# Altium PCB RFID_withESP32_PCB.PcbDoc (part 1 of 2)
Units mm, origin at the board's own origin, x right, y up, seen from the top; angles counter-clockwise.
Board outline 186.82 x 50.8 mm, 2 copper layers (Top Layer, Bottom Layer), stack 0.57 mm thick; 77 components, 38 nets, 231 pads, 164 vias.
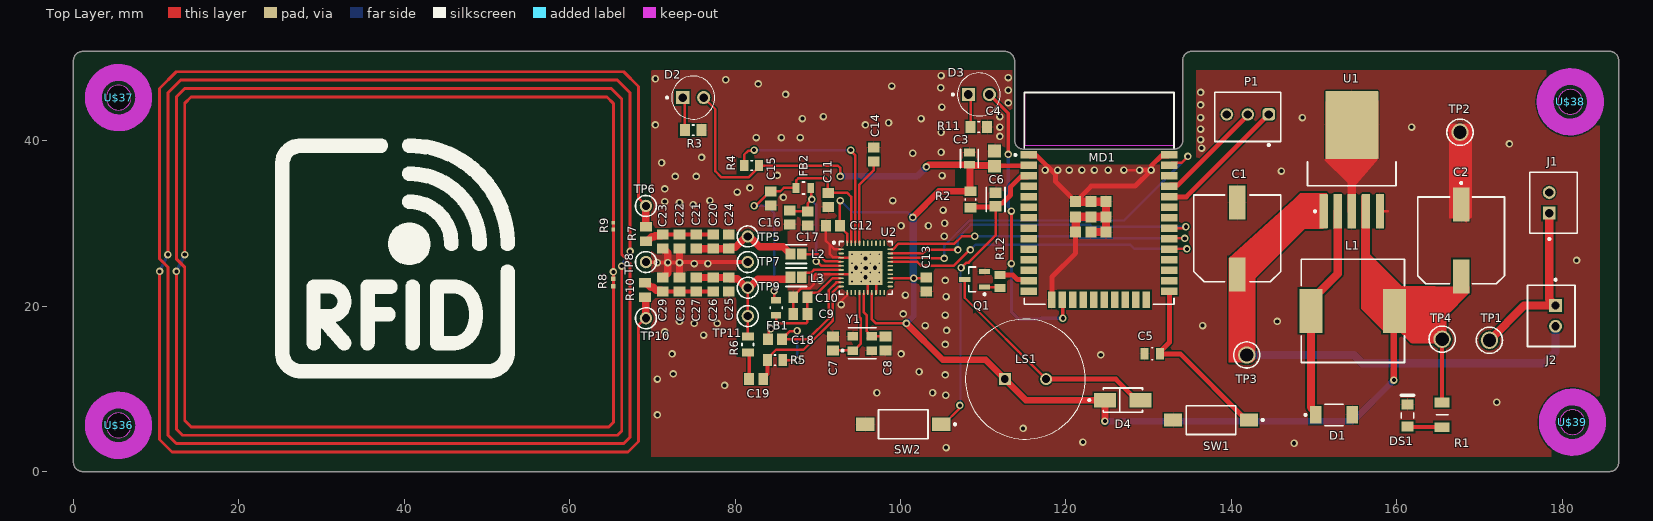
[diagram p0: Top Layer view]
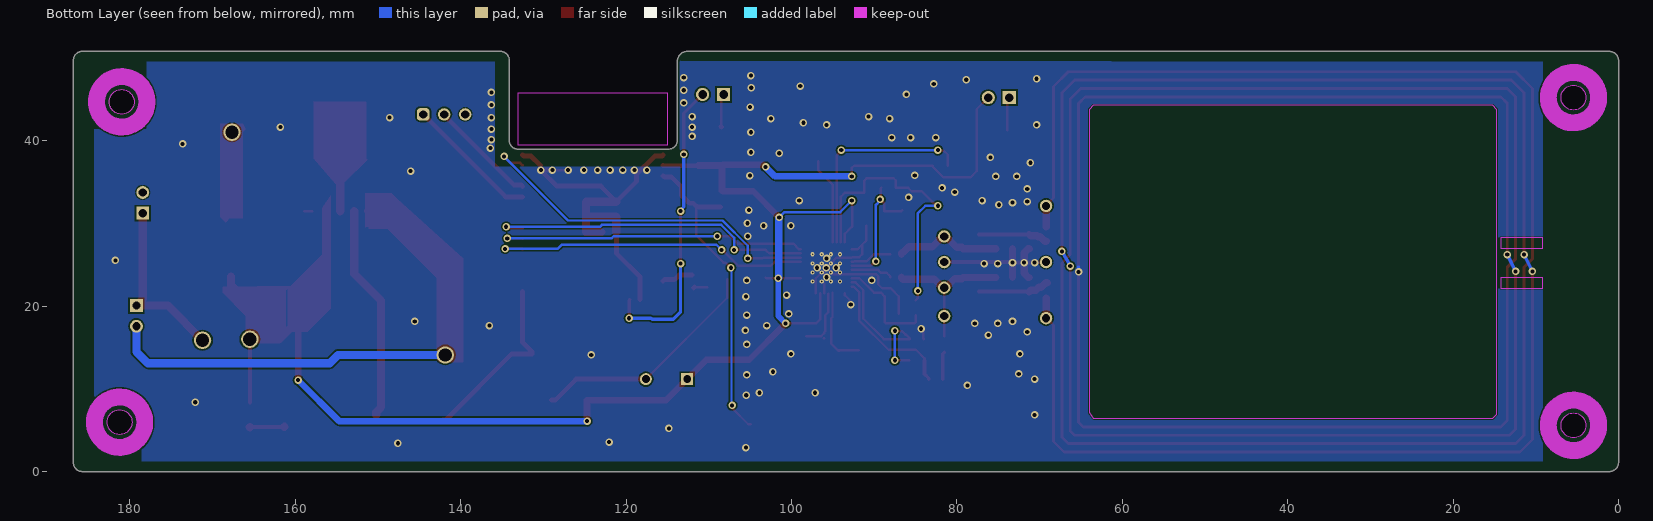
[diagram p1: Bottom Layer view, seen from below]
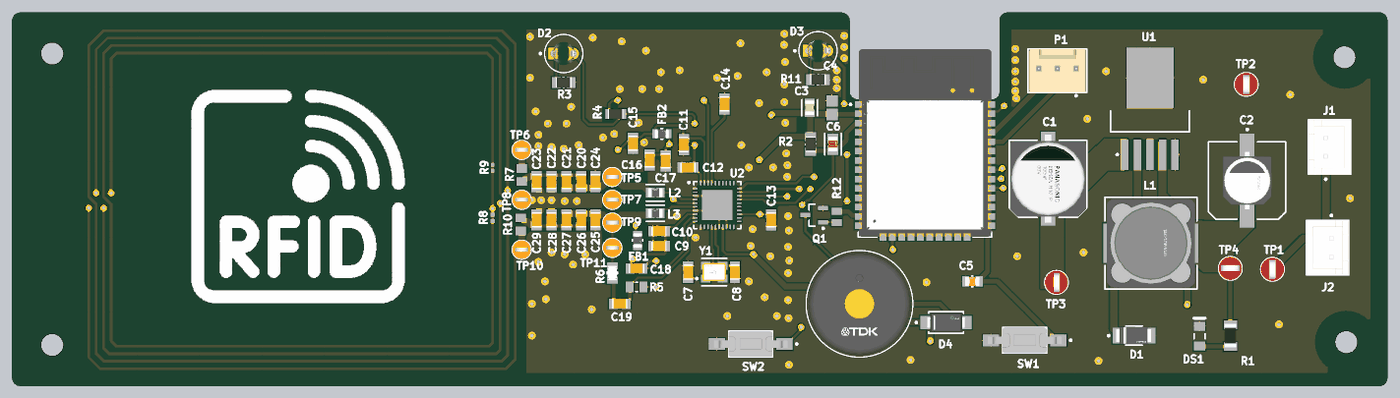
[diagram p2: 3D render of the assembled board from above, using the file's embedded part models]

## Layer stack, top to bottom
Top Solder: solder mask 0.0127, Solder Resist, Dk 3.8
Top Layer: signal copper 0.035
Dielectric: core 0.5, FR-4, Dk 4.5
Bottom Layer: signal copper 0.035
Bottom Solder: solder mask 0.0127, Solder Resist, Dk 3.8

## Board outline
1.143,0 cw(c1.143,1.143) 0,1.143 0,49.657 cw(c1.143,49.657) 1.143,50.8 112.522,50.8 cw(c112.585,49.593) 113.792,49.657 113.792,40.005 ccw(c114.871,40.069) 114.935,38.989 133.096,38.989 ccw(c133.096,40.005) 134.112,40.005 134.112,49.657 cw(c135.191,49.721) 135.128,50.8 185.801,50.8 cw(c185.737,49.721) 186.817,49.657 186.817,1.143 cw(c185.737,1.079) 185.801,0
cut-out: 181.229,4.469 ccw(c181.229,5.969) 182.729,5.969 ccw(c181.229,5.969) 181.229,7.469 ccw(c181.229,5.969) 179.729,5.969 ccw(c181.229,5.969)
cut-out: 180.975,43.204 ccw(c180.975,44.704) 182.475,44.704 ccw(c180.975,44.704) 180.975,46.204 ccw(c180.975,44.704) 179.475,44.704 ccw(c180.975,44.704)
cut-out: 5.461,43.712 ccw(c5.461,45.212) 6.961,45.212 ccw(c5.461,45.212) 5.461,46.712 ccw(c5.461,45.212) 3.961,45.212 ccw(c5.461,45.212)
cut-out: 5.461,4.088 ccw(c5.461,5.588) 6.961,5.588 ccw(c5.461,5.588) 5.461,7.088 ccw(c5.461,5.588) 3.961,5.588 ccw(c5.461,5.588)
cut-out: 180.975,43.204 ccw(c180.975,44.704) 182.475,44.704 ccw(c180.975,44.704) 180.975,46.204 ccw(c180.975,44.704) 179.475,44.704 ccw(c180.975,44.704)
cut-out: 180.975,43.204 ccw(c180.975,44.704) 182.475,44.704 ccw(c180.975,44.704) 180.975,46.204 ccw(c180.975,44.704) 179.475,44.704 ccw(c180.975,44.704)
cut-out: 181.229,4.469 ccw(c181.229,5.969) 182.729,5.969 ccw(c181.229,5.969) 181.229,7.469 ccw(c181.229,5.969) 179.729,5.969 ccw(c181.229,5.969)
cut-out: 5.461,4.088 ccw(c5.461,5.588) 6.961,5.588 ccw(c5.461,5.588) 5.461,7.088 ccw(c5.461,5.588) 3.961,5.588 ccw(c5.461,5.588)
cut-out: 5.461,43.712 ccw(c5.461,45.212) 6.961,45.212 ccw(c5.461,45.212) 5.461,46.712 ccw(c5.461,45.212) 3.961,45.212 ccw(c5.461,45.212)
cut-out: 181.229,4.469 ccw(c181.229,5.969) 182.729,5.969 ccw(c181.229,5.969) 181.229,7.469 ccw(c181.229,5.969) 179.729,5.969 ccw(c181.229,5.969)
cut-out: 5.461,4.088 ccw(c5.461,5.588) 6.961,5.588 ccw(c5.461,5.588) 5.461,7.088 ccw(c5.461,5.588) 3.961,5.588 ccw(c5.461,5.588)
cut-out: 5.461,43.712 ccw(c5.461,45.212) 6.961,45.212 ccw(c5.461,45.212) 5.461,46.712 ccw(c5.461,45.212) 3.961,45.212 ccw(c5.461,45.212)

## Design rules (kind name [scope] priority, off if disabled: settings)
BoardOutlineClearance [All] p1: gap=0.2 ignorepadtopadclearanceinfootprint=FALSE
Clearance Clearance-GND-net [InNetClass('All Nets') vs InNet('GND')] p1: gap=0.19 ignorepadtopadclearanceinfootprint=TRUE
Clearance [All] p2: gap=0.19 ignorepadtopadclearanceinfootprint=TRUE
ComponentClearance [All] p1: gap=0.127 collisioncheckmode=3 verticalgap=0.127 showdistances=TRUE
DiffPairsRouting [All] p1: maxlimit=0.254 minlimit=0.127 mostfreqgap=0.127 toplayer_minwidth=0.127 toplayer_maxwidth=25.4 toplayer_prefwidth=0.127 bottomlayer_minwidth=0.127 bottomlayer_maxwidth=25.4 bottomlayer_prefwidth=0.127 maxuncoupledlength=12.7
Height [All] p1: minheight=0 maxheight=1816.048 prefheight=12.7
HoleSize [All] p1: absolutevalues=TRUE maxlimit=6.3 minlimit=0.3 maxpercent=80.000 minpercent=20.000
HoleToHoleClearance [All] p1: gap=0.25 allowstackedmicrovias=FALSE
MinimumAnnularRing [All] p1: minimumring=0.076
MinimumSolderMaskSliver [All] p1: minsoldermaskwidth=0
PlaneClearance [All] p1: clearance=0.127
PlaneConnect PlaneConnectPowerPads [InPadClass('PowerPads')] p1: planeconnectstyle=Direct reliefexpansion=0.508 reliefentries=4 reliefconductorwidth=0.254 reliefairgap=0.254
PlaneConnect [All] p2: pad.planeconnectstyle=Relief pad.reliefexpansion=0.3 pad.reliefentries=4 pad.reliefconductorwidth=0.127 pad.reliefairgap=0.127 via.planeconnectstyle=Direct via.reliefexpansion=0.3 via.reliefentries=4 via.reliefconductorwidth=0.127 via.reliefairgap=0.127
PolygonConnect PolygonConnectPowerPads [All vs (InPadClass('PowerPads'))] p1: connectstyle=Direct reliefconductorwidth=0.254 reliefentries=4 polygonreliefangle="90 Angle" airgapwidth=0.254
PolygonConnect [All] p2: thpad.connectstyle=Relief thpad.reliefconductorwidth=0.127 thpad.reliefentries=4 thpad.polygonreliefangle="90 Angle" thpad.airgapwidth=0.127 smdpad.connectstyle=Relief smdpad.reliefconductorwidth=0.127 smdpad.reliefentries=4 smdpad.polygonreliefangle="90 Angle" smdpad.airgapwidth=0.127 via.connectstyle=Direct via.reliefconductorwidth=0.127 via.reliefentries=4 via.polygonreliefangle="90 Angle" via.airgapwidth=0.127
RoutingVias [All] p1: holewidth=0.394 width=0.8 viastyle="Through Hole" minholewidth=0.3 minwidth=0.6 maxholewidth=0.6 maxwidth=6.6
SilkToSilkClearance [All] p1: silktosilkclearance=0
SilkToSolderMaskClearance [IsPad] p1: minsilkscreentomaskgap=0.127 clearancetoexposedcopper=TRUE
SolderMaskExpansion [All] p1: expansion=0.075 istentingtop=FALSE
Width [All] p1: maxlimit=25.4 minlimit=0.127 preferedwidth=0.3 minimp=50.000000 maximp=50.000000 favimp=50.000000
20 further rules are at their usual default settings.

## Classes and differential pairs
component class U_RFID_Reader: C7 C8 C9 C10 C11 C12 C13 C14 C15 C16 C17 C18 C19 D2 FB1 FB2 L2 L3 R3 R4 R5 R6 TP11 U2 Y1
component class U_Power_Circuit: C1 C2 D1 DS1 J1 J2 L1 R1 TP1 TP2 TP3 TP4 U1
component class U_Outputs: D3 D4 LS1 Q1 R11 R12
component class U_ESP32-WROOM-32: C3 C4 C5 C6 MD1 P1 R2 SW1 SW2
component class U_Antenna_Matching_Circuit: C20 C21 C22 C23 C24 C25 C26 C27 C28 C29 R7 R8 R9 R10 TP5 TP6 TP7 TP8 TP9 TP10

## Components (designator, comment, footprint, x,y, rotation, side; value= is the part's Value field where it differs from the comment)
C1 "470uF" FP-ZAG-MFG 140.716,28.194 r270 top value=100uF
C2 "330uF" FP-FKG-MFG 167.767,27.94 r270 top
C3 "10uF" FP-C0805C-DG-MFG 108.331,37.846 r270 top
C4 "0.1uF" CAPC2013X94X50ML20T25 111.379,37.846 r270 top
C5 "100nF" FP-CC0805-0_85-MFG 130.429,14.224 r180 top value="100 nF"
C6 "100nF" FP-0805-L_2_01_0_2-W_1_25-IPC_B 111.506,32.893 r90 top
C7 "33pF" CAPC2013X135X45NL10T25 91.837,15.49 r270 top
C8 "33pF" CAPC2013X135X45NL10T25 98.187,15.49 r90 top
C9 "0.1uF" CAPC2013X135X45NL10T25 87.884,19.05 r0 top
C10 "10uF" CAPC2013X135X45NL10T25 87.884,21.082 r0 top
C11 "0.1uF" CAPC2013X135X45NL10T25 91.242,32.837 r270 top
C12 "0.1uF" CAPC2013X135X45NL10T25 91.821,29.718 r180 top
C13 "0.1uF" CAPC2013X135X45NL10T25 103.124,22.606 r90 top
C14 "10uF" CAPC2013X135X45NL10T25 96.774,38.354 r270 top
C15 "0.1uF" CAPC2013X135X45NL10T25 84.332,33.02 r90 top
C16 "10uF" CAPC2013X135X45NL10T25 86.618,30.734 r90 top
C17 "0.1uF" CAPC2013X135X45NL10T25 88.777,30.607 r90 top
C18 "0.1uF" CAPC2013X135X45NL10T25 84.832,16.006 r0 top
C19 "1000pF" CAPC2013X135X45NL10T25 82.55,11.192 r180 top
C20 "NC" CAPC2013X135X45NL10T25 77.335,27.809 r90 top
C21 "22pF" CAPC2013X135X45NL10T25 75.307,27.809 r90 top
C22 "100pF" CAPC2013X135X45NL10T25 73.279,27.809 r90 top
C23 "NC" CAPC2013X135X45NL10T25 71.251,27.809 r90 top
C24 "220pF" CAPC2013X135X45NL10T25 79.24,27.809 r270 top
C25 "220pF" CAPC2013X135X45NL10T25 79.24,22.61 r270 top
C26 "NC" CAPC2013X135X45NL10T25 77.335,22.61 r90 top
C27 "22pF" CAPC2013X135X45NL10T25 75.307,22.61 r90 top
C28 "100pF" CAPC2013X135X45NL10T25 73.279,22.61 r90 top
C29 "NC" CAPC2013X135X45NL10T25 71.251,22.61 r90 top
D1 "CMS06(TE12L,Q,M)" FP-M-FLAT-MFG 152.4,6.858 r180 top
D2 "POWER-LED" FP-6_544-5255_01-4-MFG 74.93,45.212 r0 top
D3 "Detect-LED" FP-6_544-5255_01-4-MFG 109.474,45.593 r0 top
D4 "RS1M" FP-403AE-MFG 126.873,8.636 r0 top value=10pF
DS1 "SML-LX1206IC-TR" LUMX-SML-LX1206IC_V 161.29,6.778 r90 top
FB1 "HZ0805B272R-10" FP-MPZ2012-MFG 84.963,19.812 r270 top
FB2 "HZ0805B272R-10" FP-MPZ2012-MFG 88.265,34.29 r0 top
J1 "B2B-XH-A(LF)(SN)" FP-B2B-XH-A_LF_SN-MFG 178.96,32.492 r90 top
J2 "Switch" FP-B2B-XH-A_LF_SN-MFG 178.672,18.816 r270 top
L1 "SRR1210-101M" FP-SRR1210-MFG 154.686,19.431 r0 top
L2 "560nH" FP-LQM21DN_00-IPC_C 87.376,26.289 r180 top
L3 "560nH" FP-LQM21DN_00-IPC_C 87.376,23.495 r180 top
LS1 "BUZZER" FP-PS1440P02BT-MFG 115.102,11.176 r0 top
MD1 "ESP32-WROOM-32" FP-ESP32-WROOM-32-MFG 124.006,33.031 r0 top
P1 "61900311121" 61900311121 141.986,42.88 r0 top
Q1 "BC847C" INF-SOT23_M 108.966,23.241 r180 top
R1 "2K" RESC3216X75N 165.481,6.858 r90 top
R2 "1K" RESC2013X60X35ML10T20 108.458,32.893 r270 top
R3 "10R" RESC2013X60X35ML10T20 74.93,41.275 r0 top
R4 "10K" RESC2013X60X35NL10T20 82,37 r0 top
R5 "1.0K" RESC2013X50X30NL20T20 84.832,13.474 r0 top
R6 "1.7K" FP-CRCW0805-e3-MFG 81.534,15.371 r270 top
R7 "1.5" RESC2013X70X40NL20T20 69.219,28.706 r90 top
R8 "NC" RESC1005X40X25NL05T05 65.278,22.855 r90 top
R9 "NC" RESC1005X40X25LL05T05 65.278,29.674 r90 top
R10 "1.5" RESC2013X70X40NL20T20 69.096,21.967 r90 top
R11 "10R" RESC2013X60X35ML10T20 109.474,41.656 r0 top
R12 "220R" RESC2013X70X40LL20T20 112.014,22.987 r270 top
SW1 "Boot Button" TECO-FSMSM-2_V 137.541,6.223 r180 top
SW2 "RESET Button" TECO-FSMSM-2_V 100.33,5.715 r180 top
TP1 "12V_IN" KSTN-5010_V 171.196,15.875 r90 top
TP2 "GND" KSTN-5010_V 167.64,41.021 r90 top
TP3 "12V" KSTN-5010_V 141.859,14.097 r90 top
TP4 "3.3V" KSTN-5010_V 165.481,16.002 r0 top
TP5 "TX1_POST" KSTN-5003 81.534,28.43 r0 top
TP6 "TX1_PRE" KSTN-5003 69.223,32.113 r0 top
TP7 "TGND" KSTN-5003 81.534,25.327 r0 top
TP8 "TGND" KSTN-5003 69.227,25.327 r0 top
TP9 "TX2_POST" KSTN-5003 81.534,22.224 r0 top
TP10 "TX2_PRE" KSTN-5003 69.223,18.541 r0 top
TP11 "RX" KSTN-5003 81.534,18.796 r0 top
U1 "LM2596S-3.3" KTT0005B_N 154.559,37.719 r90 top
U2 "PN5321A3HN/C106;55" NXP-HVQFN-40_L 95.79,24.62 r0 top
U$36 "" MOUNTINGHOLE_3.0 5.461,5.588 r0 top
U$37 "" MOUNTINGHOLE_3.0 5.461,45.212 r0 top (schematic designator U$36)
U$38 "" MOUNTINGHOLE_3.0 180.975,44.704 r0 top (schematic designator U$36)
U$39 "" MOUNTINGHOLE_3.0 181.229,5.969 r0 top (schematic designator U$36)
Y1 "ABM8-27.120MHZ-B4-T" FP-ABM8-MFG 95.377,15.494 r0 top

## Footprints (in the part's own frame and the unit in brackets; to place one, negate y for a bottom-side part, rotate by r counter-clockwise, add the part's x,y. Pads: shape width x height; smd on the part's side, far side on the other; paste and mask are expansions set on the pad)
61900311121 [mm] "2.54mm Male Locking Header, 3p"
  rrect50% 1.5x1.5 hole 1: 1(2.54,0.3)
  round 1.5 hole 1: 2(0,0.3) 3(-2.54,0.3)
  silkscreen extent -3.98,-3.52 3.98,2.98, body extent -3.81,-2.9 3.81,2.9, height 11.53
CAPC2013X94X50ML20T25 [mm] "Chip Capacitor, 2-Leads, Body 2.01x1.25mm, IPC Low Density"
  rect 1.55x1.55 smd: 1(-0.925,0) 2(0.925,0)
  body extent -1.1,-0.72 1.11,0.72, height 0.94
CAPC2013X135X45NL10T25 [mm] "Chip Capacitor, 2-Leads, Body 2.10x1.35mm, IPC Medium Density"
  rect 1.2x1.4 smd: 1(-0.85,0) 2(0.85,0)
  body extent -1.05,-0.67 1.05,0.67, height 1.35
FP-6_544-5255_01-4-MFG [mm]
  rect 1.6x1.6 hole 1.05 paste-1000 mask+0: 1(-1.27,0)
  round 1.6 hole 1.05 paste-1000 mask+0: 2(1.27,0)
  silkscreen extent -3.27,-2.6 2.6,2.6, body extent -2.32,-2.32 2.32,2.32, height 0.25
FP-403AE-MFG [mm]
  rect 2.65x1.75 smd paste+0 mask+0: 1(-2.15,0) 2(2.15,0)
  silkscreen extent -4.17,-1.48 2.37,1.48, body extent -3.57,-1.58 3.57,1.58, height 0.25
FP-0805-L_2_01_0_2-W_1_25-IPC_B [mm]
  rect 1.305x1.456 smd paste+0 mask+0: 1(-0.806,0) 2(0.806,0)
  silkscreen extent -1.46,-1.13 1.46,1.13, body extent -1.71,-0.98 1.71,0.98, height 0.25
FP-ABM8-MFG [mm]
  rect 1.3x1.05 smd paste+0 mask+0: 1(-1.15,-0.875) 2(1.15,-0.875) 3(1.15,0.875) 4(-1.15,0.875)
  silkscreen extent -2.5,-1.88 1.7,1.88, body extent -1.9,-1.5 1.9,1.5, height 0.25
FP-B2B-XH-A_LF_SN-MFG [mm]
  rect 1.55x1.55 hole 1 paste-1000 mask+0: 1(-1.25,0.525)
  round 1.55 hole 1 paste-1000 mask+0: 2(1.25,0.525)
  silkscreen extent -4.5,-2.88 3.7,2.88, body extent -3.8,-2.98 3.8,2.98, height 0.25
FP-C0805C-DG-MFG [mm]
  rect 0.95x1.35 smd paste+0 mask+0: 1(-0.75,0) 2(0.75,0)
  silkscreen extent -1.11,-1.08 1.1,1.07, body extent -1.4,-0.85 1.4,0.85, height 0.25
FP-CC0805-0_85-MFG [mm]
  rect 0.95x1.4 smd paste+0 mask+0: 1(-0.925,0) 2(0.925,0)
  silkscreen extent -0.08,-0.72 0.08,0.72, body extent -1.6,-1.05 1.6,1.05, height 0.25
FP-CRCW0805-e3-MFG [mm]
  rect 0.95x1.45 smd paste+0 mask+0: 1(-0.975,0) 2(0.975,0)
  silkscreen extent -0.13,-0.7 0.13,0.7, body extent -1.55,-0.82 1.55,0.82, height 0.25
FP-ESP32-WROOM-32-MFG [mm]
  rect 2x0.9 smd paste+0 mask+0: 1(-8.5,5.26) 2(-8.5,3.99) 3(-8.5,2.72) 4(-8.5,1.45) 5(-8.5,0.18) 6(-8.5,-1.09) 7(-8.5,-2.36) 8(-8.5,-3.63) 9(-8.5,-4.9) 10(-8.5,-6.17) 11(-8.5,-7.44) 12(-8.5,-8.71) 13(-8.5,-9.98) 14(-8.5,-11.25) 25(8.5,-11.25) 26(8.5,-9.98) 27(8.5,-8.71) 28(8.5,-7.44) 29(8.5,-6.17) 30(8.5,-4.9) 31(8.5,-3.63) 32(8.5,-2.36) 33(8.5,-1.09) 34(8.5,0.18) 35(8.5,1.45) 36(8.5,2.72) 37(8.5,3.99) 38(8.5,5.26)
  rect 0.9x2 smd paste+0 mask+0: 15(-5.715,-12.25) 16(-4.445,-12.25) 17(-3.175,-12.25) 18(-1.905,-12.25) 19(-0.635,-12.25) 20(0.635,-12.25) 21(1.905,-12.25) 22(3.175,-12.25) 23(4.445,-12.25) 24(5.715,-12.25)
  rect 1.33x1.33 smd paste+0 mask+0: 39(-2.835,-4.075) 39(-2.835,-2.24) 39(-2.835,-0.405) 39(-1,-4.075) 39(-1,-2.24) 39(-1,-0.405) 39(0.835,-4.075) 39(0.835,-2.24) 39(0.835,-0.405)
  Keep-Out Layer region: -9,6.45 9,6.45 9,12.75 -9,12.75
  Keep-Out Layer region: -9,6.45 9,6.45 9,12.75 -9,12.75
  silkscreen extent -10.25,-12.8 9.05,12.8, body extent -9.6,-13.35 9.6,12.9, height 0.25
FP-FKG-MFG [mm]
  rect 4.1x2 smd paste+0 mask+0: 1(-4.35,0) 2(4.35,0)
  silkscreen extent -7.07,-5.25 5.25,5.25, body extent -6.65,-5.5 6.65,5.5, height 0.25
FP-LQM21DN_00-IPC_C [mm]
  rect 1.154x1.356 smd paste+0 mask+0: 1(-0.676,0) 2(0.676,0)
  silkscreen extent -1.25,-1.12 1.25,1.12, body extent -1.35,-0.82 1.35,0.82, height 0.25
FP-M-FLAT-MFG [mm]
  rect 1.4x2.1 smd paste+0 mask+0: 1(-2.2,0) 2(2.2,0)
  silkscreen extent -1.12,-1.3 3.57,1.3, body extent -3,-1.4 3,1.4, height 0.25
FP-MPZ2012-MFG [mm]
  rect 0.8x1.2 smd paste+0 mask+0: 1(-0.9,0) 2(0.9,0)
  silkscreen extent -0.13,-0.72 0.13,0.72, body extent -1.4,-0.82 1.4,0.82, height 0.25
FP-PS1440P02BT-MFG [mm]
  rect 1.45x1.45 hole 0.95 paste-1000 mask+0: 1(-2.5,0)
  round 1.45 hole 0.95 paste-1000 mask+0: 2(2.5,0)
  silkscreen extent -7.25,-7.25 7.25,7.25, body extent -7.35,-7.35 7.35,7.35, height 0.25
FP-SRR1210-MFG [mm]
  rect 2.8x5.3 smd paste+0 mask+0: 1(-5.05,0) 2(5.05,0)
  silkscreen extent -6.25,-6.25 6.25,6.25, body extent -6.55,-6.35 6.55,6.35, height 0.25
FP-ZAG-MFG [mm]
  rect 4.1x2 smd paste+0 mask+0: 1(-4.35,0) 2(4.35,0)
  silkscreen extent -5.25,-5.25 5.25,5.25, body extent -6.65,-5.5 6.65,5.5, height 0.25
INF-SOT23_M [mm] "SOT23, 3-Leads, Body 2.9x1.3 mm, Pitch 0.95 mm, IPC Low Density"
  rect 1.35x0.6 smd: 1(-1.2,0.95) 2(-1.2,-0.95) 3(1.2,0)
  silkscreen extent -1.33,-1.5 0.7,1.92, body extent -0.7,-1.5 0.7,1.5, height 1.1
KSTN-5003 [mm] "Test Point, Through Hole, Dia 2.54mm"
  round 1.5 hole 1: 1(0,0)
  silkscreen extent -1.27,-1.27 1.27,1.27, body extent -1.27,-1.27 1.27,1.27, height 4.57
KSTN-5010_V [mm] "Test Point, Dia 3.17mm"
  round 2.1 hole 1.6: 1(0,0)
  silkscreen extent -1.58,-1.59 1.58,1.59, body extent -1.59,-1.59 1.59,1.59, height 8.13
KTT0005B_N [mm] "DPAK, 5-Leads, Body 10.65x9.65mm, Pitch 1.7mm, IPC Medium Density"
  rrect10% 4.15x1 smd: 1(-6.25,3.4) 2(-6.25,1.7) 3(-6.25,0) 4(-6.25,-1.7) 5(-6.25,-3.4)
  rrect2% 8.2x6.4 smd: 6(4.2,0)
  silkscreen extent -6.37,-5.35 -0.3,5.35, body extent -3.15,-5.32 6.5,5.33, height 4.83
LUMX-SML-LX1206IC_V [mm] "SMD, 2-Leads, Body 3.2x1.5mm"
  rect 1.2x1.5 smd: 1(-1.35,0) 2(1.35,0)
  silkscreen extent -0.35,-0.75 2.45,0.75, body extent -1.6,-0.8 1.6,0.8, height 1.1
MOUNTINGHOLE_3.0 [mm] "MOUNTINGHOLE_3.0"
  Top Layer keep-out circle w2.032: c0,0 r3.048
  Top Layer keep-out circle w2.032: c0,0 r3.048
  Top Layer keep-out circle w2.032: c0,0 r3.048
  Bottom Layer keep-out circle w2.032: c0,0 r3.048
  Bottom Layer keep-out circle w2.032: c0,0 r3.048
NXP-HVQFN-40_L [mm] "QFN, 40-Leads, Body 6.1x6.1mm, Pitch 0.5mm, Thermal Pad 4.1x4.1mm, IPC High Density"
  oval 0.65x0.2 smd: 1(-2.975,2.25) 2(-2.975,1.75) 3(-2.975,1.25) 4(-2.975,0.75) 5(-2.975,0.25) 6(-2.975,-0.25) 7(-2.975,-0.75) 8(-2.975,-1.25) 9(-2.975,-1.75) 10(-2.975,-2.25) 21(2.975,-2.25) 22(2.975,-1.75) 23(2.975,-1.25) 24(2.975,-0.75) 25(2.975,-0.25) 26(2.975,0.25) 27(2.975,0.75) 28(2.975,1.25) 29(2.975,1.75) 30(2.975,2.25)
  oval 0.2x0.65 smd: 11(-2.25,-2.975) 12(-1.75,-2.975) 13(-1.25,-2.975) 14(-0.75,-2.975) 15(-0.25,-2.975) 16(0.25,-2.975) 17(0.75,-2.975) 18(1.25,-2.975) 19(1.75,-2.975) 20(2.25,-2.975) 31(2.25,2.975) 32(1.75,2.975) 33(1.25,2.975) 34(0.75,2.975) 35(0.25,2.975) 36(-0.25,2.975) 37(-0.75,2.975) 38(-1.25,2.975) 39(-1.75,2.975) 40(-2.25,2.975)
  rect 4.1x4.1 smd: 41(0,0)
  silkscreen extent -3.97,-3.2 3.2,3.2, body extent -3.05,-3.05 3.05,3.05, height 1
RESC1005X40X25LL05T05 [mm] "Chip Resistor, 2-Leads, Body 1.00x0.50mm, IPC High Density"
  rect 0.45x0.45 smd: 1(-0.4,0) 2(0.4,0)
  body extent -0.53,-0.27 0.53,0.28, height 0.4
RESC1005X40X25NL05T05 [mm] "Chip Resistor, 2-Leads, Body 1.00x0.50mm, IPC Medium Density"
  rect 0.55x0.55 smd: 1(-0.45,0) 2(0.45,0)
  body extent -0.53,-0.27 0.53,0.28, height 0.4
RESC2013X50X30NL20T20 [mm] "Chip Resistor, 2-Leads, Body 2.00x1.25mm, IPC Medium Density"
  rect 1.05x1.45 smd: 1(-0.925,0) 2(0.925,0)
  silkscreen extent -0.1,-0.63 0.1,0.63, body extent -1.1,-0.72 1.1,0.72, height 0.5
RESC2013X60X35ML10T20 [mm] "Chip Resistor, 2-Leads, Body 2.1x1.35mm, IPC Low Density"
  rect 1.2x1.45 smd: 1(-1,0) 2(1,0)
  silkscreen extent -0.1,-0.63 0.1,0.63, body extent -1.05,-0.68 1.05,0.67, height 0.6
RESC2013X60X35NL10T20 [mm] "Chip Resistor, 2-Leads, Body 2.1x1.35mm, IPC Medium Density"
  rect 1x1.35 smd: 1(-0.9,0) 2(0.9,0)
  silkscreen extent -0.1,-0.58 0.1,0.58, body extent -1.05,-0.68 1.05,0.67, height 0.6
RESC2013X70X40LL20T20 [mm] "Chip Resistor, 2-Leads, Body 2.00x1.25mm, IPC High Density"
  rect 0.95x1.35 smd: 1(-0.775,0) 2(0.775,0)
  body extent -1.1,-0.72 1.1,0.72, height 0.7
RESC2013X70X40NL20T20 [mm] "Chip Resistor, 2-Leads, Body 2.00x1.25mm, IPC Medium Density"
  rect 1.15x1.45 smd: 1(-0.875,0) 2(0.875,0)
  body extent -1.1,-0.72 1.1,0.72, height 0.7
RESC3216X75N [mm]
  rect 1.2x1.8 smd: 1(-1.5,0) 2(1.5,0)
  silkscreen extent 0,-0.7 0,0.7, body extent -1.6,-0.8 1.6,0.8, height 0.75
TECO-FSMSM-2_V [mm] "SMD, 2-Leads, Body 6x3.5mm, Pitch 9.19mm"
  rect 2.2x1.6 smd: 1(-4.595,0)
  rect 2.18x1.6 smd: 2(4.595,0)
  silkscreen extent -6.37,-1.75 3,1.75, body extent -4.98,-1.75 4.98,1.75, height 4.4

## Part data
C1: library part CMP-2000-06221-2, "CAP ALUM POLY HYB 100UF 50V SMD", Capacitance=100uF, Leakage Current=50uA, Manufacturer=Panasonic, Manufacturer Part Number=EEHZA1H101P, Package=ZAG, Ripple Current=2000mA, Temperature="-55°C to +105°C", Temperature Range High=+105°C, Temperature Range Low=-55°C, Tolerance=20%, Voltage=50V, Automotive=Yes, Automotive Grade="Grade 2", Category=Cap, ComponentLink2Description=Datasheet, ComponentLink2URL=https://industrial.panasonic.com/cdbs/www-data/pdf/RDD0000/ABA0000C1221.pdf, Device Class L1="Passive Components", Device Class L2=Capacitors, Device Class L3="Polymer Capacitors", Digikey Description="CAP ALUM POLY HYB 100UF 50V SMD", Dissipation Factor=10%, Esr=28mΩ, Footprint Url=https://industrial.panasonic.com/cdbs/www-data/pdf/RDD0000/DMD0000COL4.pdf, Height=10.5mm, Lead Free=Yes, Life=10000Hours, Material="Conductive Polymer", Mounting Type="Surface Mount", Mouser Description="Cap Aluminum Polymer Hybrid 100uF 50VDC 20% (10 X 10.2mm) SMD 0.028 Ohm 2000mA 10000h 105C Embossed T/R", Octopart=https://octopart.com/eeh-za1h101p-panasonic-22287466, RoHS=TRUE, Voltage Rating=50V
C2: library part CMP-05427-002115-1, "CAP ALUM 330UF 20% 35V SMD", Case/Package=Radial, Dielectric Material=Aluminium, ESR (Equivalent Series Resistance)=80mR, Leakage Current=115.5uA, Max Operating Temperature=105°C, Min Operating Temperature=-55°C, Package Quantity=500, Ratings=AEC-Q200, Ripple Current=850mA, Tolerance=20%, Voltage=35V, Capacitance=330uF, Construction=Cylindrical, Contact Plating=Tin, Diameter=10mm, Height=10.2mm, Height - Seated (Max)=0.402inch, Impedance=80mR, Lead Free="Lead Free", Lead Length=3.5mm, Lead Pitch=4.6mm, Length=10.2mm, Life (Hours)=2000Hour, Mount="Surface Mount", Number of Pins=2, Packaging="Tape and Reel", Radiation Hardening=No, Reach SVHC Compliant=Yes, Ripple Current (AC)=850mA, RoHS Compliant=Yes, Series=FK, Termination=SMD/SMT, Voltage Rating=35V, Voltage Rating (DC)=35V, Width=10.3mm
C3: library part CMP-2007-03243-2, "CAP CER 10UF 10V X5R 0805", 3DS Part Number=220-00001, Manufacturer=Kemet, Manufacturer Part Number=C0805C106K8PACTU, Package=C0805C-DG, Temperature="-55°C to +85°C", Temperature Characteristic=X5R, Temperature Coefficient=15%, Temperature Range High=+85°C, Temperature Range Low=-55°C, Tolerance=10%, Voltage=10V, Automotive=No, Capacitance=10uF, Category=Cap, ComponentLink2Description=Datasheet, ComponentLink2URL=https://content.kemet.com/datasheets/KEM_C1006_X5R_SMD.pdf, Device Class L1="Passive Components", Device Class L2=Capacitors, Device Class L3="Ceramic Capacitors", Digikey Description="CAP CER 10UF 10V X5R 0805", Height=1.4mm, Ipc Land Pattern Name=CAPC200125X125, Lead Free=Yes, Material=Ceramic, Mouser Description="CAP CER 10UF 10V X5R 0805", Octopart=https://octopart.com/c0805c106k8pactu-kemet-98697, RoHS=TRUE, Voltage Rating=10V
C4: library part CMP-1036-04427-2, Manufacturer="AVX Interconnect / Elco", Part Number=08051C104JAT2A
C5: library part CMP-2100-03606-3, "CAP CER 0.1UF 50V X7R 0805", Capacitance="100 nF", Manufacturer=Yageo, Manufacturer Part Number=CC0805KRX7R9BB104, Package=CC0805-0.85, Temperature="-30°C to +85°C", Temperature Characteristic=X7R, Temperature Range High=+85°C, Temperature Range Low=-30°C, Tolerance=0.1, Voltage Rating="50 V", Automotive=No, Category=Cap, ComponentLink2Description=Datasheet, ComponentLink2URL=http://www.yageo.com/documents/recent/UPY-GPHC_Y5V_6.3V-to-50V_8.pdf, Device Class L1="Passive Components", Device Class L2=Capacitors, Device Class L3="Ceramic Capacitors", Digikey Description="CAP CER 0.1UF 50V X7R 0805", Footprint Url=http://www.yageo.com/exep/pages/download/literatures/UPY-C_GEN_24.pdf, Height=0.95mm, Ipc Land Pattern Name=CAPC200125X85, Lead Free=Yes, Material=Ceramic, Mouser Description="Multilayer Ceramic Capacitors MLCC - SMD/SMT 100nF 50V X7R 10%", Octopart=https://octopart.com/cc0805krx7r9bb104-yageo-192993, RoHS=TRUE
C6: library part CMP-2007-04174-2, "General Purpose Ceramic Capacitor, 0805, 100nF, 10%, X7R, 15%, 100V", Case Code (Imperial)=0805, Case Code (Metric)=2012, Dielectric=X7R, Dielectric Material=Ceramic, Max Operating Temperature=125°C, Min Operating Temperature=-55°C, Package Quantity=2000, Tolerance=10%, Voltage=100V, Capacitance=100nF, Case/Package=0805, Construction=Flat, Contact Plating=Tin, Depth=1.25mm, Height=1.4mm, Lead Free="Lead Free", Length=2.01mm, Mount="Surface Mount", Number of Pins=2, Packaging="Tape and Reel", Radiation Hardening=No, REACH SVHC="No SVHC", RoHS Compliant=Yes, Series=-, Termination=SMD/SMT, Thickness=0.055inch, Voltage Rating=100V, Voltage Rating (DC)=100V, Width=0.049inch
C7 C8 C9 C10 C11 C12 C13 C14 C15 C16 C17 C18 C19 C20 C21 C22 C23 C24 C25 C26 C27 C28 C29: library part CMP-2100-03644-1, "Chip Capacitor, 0.1 uF, +/- 10%, 50 V, -55 to 125 degC, 0805 (2012 Metric), RoHS, Tape and Reel", Capacitance=100nF, Case Code (Imperial)=0805, Case Code (Metric)=2012, Dielectric=X7R, Dielectric Material=Ceramic, Insulation Resistance=10GR, Manufacturer=Murata, Max Operating Temperature=125degC, Min Operating Temperature=-55degC, Package Description="2-Pin Surface Mount Device, Body 2 x 1.25 mm", Package Quantity=1, Tolerance=10%, Voltage=50V, Case/Package=0805, Datasheet URL=http://psearch.en.murata.com/capacitor/product/GRM21BR71H104KA01%23.pdf, Datasheet Version=42675.0, Depth=1.25mm, Height=1.25mm, Lead Free=LeadFree, Length=2mm, Manufacturer URL=http://www.murata.com/, Material=Ceramic, Mount=SurfaceMount, Number of Pins=2, Package Reference=0805, Packaging=TapeandReel, Radiation Hardening=No, REACH SVHC=Unknown, RoHSCompliant=true, Termination=SMD/SMT, Thickness=0.053inch, Voltage Rating=50V, Voltage Rating (DC)=50V, Width=0.049inch
D1: library part CMP-2000-06115-2, "DIODE SCHOTTKY 30V 2A MFLAT", Average Rectified Current=2A, Forward Voltage=370mV, Max Operating Temperature=125°C, Max Repetitive Reverse Voltage (Vrrm)=30V, Max Reverse Leakage Current=3mA, Max Surge Current=40A, Min Operating Temperature=-40°C, Package Quantity=1, Contact Plating=Tin, Element Configuration=Single, Forward Current=2A, Max Reverse Voltage (DC)=30V, Mount="Surface Mount", Number of Pins=2, Packaging="Tape and Reel", Peak Non-Repetitive Surge Current=40A, Peak Reverse Current=3mA, Radiation Hardening=No
D2 D3: library part CMP-00030-55433990-1, "TLLG4400 Led, Pcb, Green, 0.63MCD, 3MM, T-1, 7MA, 1.9V, 565NM, 25DEG, 20V, 20MW, -40", Case/Package=T, Color=Green, Forward Current=2mA, Forward Voltage=1.9V, Max Operating Temperature=100°C, Max Power Dissipation=20mW, Min Operating Temperature=-40°C, Reverse Voltage=20V, Voltage Rating (DC)=2.4V, Depth=3.2mm, Dominant Wavelength=575nm, Height=4.5mm, Illumination Color=Green, Length=3.2mm, Lens Color=Green, Lens Size=3mm, Lens Style="Circular, Colored, Diffused, Dome, Round", Lens Transparency=Diffused, Luminous Intensity=1.2mcd, Mount="Through Hole", NexarPartId=55433990, Number of Elements=1, Number of LEDs=1, Number of Pins=2, Power Dissipation=20mW, Radiation Hardening=No, REACH SVHC=Unknown, RoHS=Compliant, Schedule B="8541402000, 8541402000", Test Current=2mA, Viewing Angle=50°, Wavelength=575nm
D4: library part CMP-07163-000022-1, "DIODE GEN PURP 1KV 1A SMA", Capacitance=10pF, Forward Current=1A, Manufacturer="ON Semiconductor", Max Junction Temp=+150°C, Max Repetitive Reverse Voltage=1000V, Max Surge Forward Current=30A, Package=403AE, Peak Reverse Current=5uA, Temperature="-55°C to +150°C", Temperature Range Low=-55°C, Automotive=No, Category=Diode, ComponentLink2Description=Datasheet, ComponentLink2URL=https://www.onsemi.com/pub/Collateral/RS1M-D.PDF, Device Class L1="Discrete Semiconductors", Device Class L2=Diodes, Device Class L3="Rectifier Diodes", Digikey Description="DIODE GEN PURP 1KV 1A SMA", Footprint Url=https://www.onsemi.com/pub/Collateral/403AE.PDF, Height=2.5mm, Lead Free=Yes, Manufacturer Part Number=RS1M, Mouser Description="On a Reel of 7500, ON Semi 1000V 1A, Diode, 2-Pin DO-214AC RS1M", Octopart=https://octopart.com/rs1m-on+semiconductor-84331238, RoHS=TRUE, Standoff Height=0.05mm, Temperature Range High=+150°C
DS1: library part CMP-2000-07123-1, "LED Red, 65 mW, -40 to 85 degC, 2-Pin SMD, RoHS, Tape and Reel", Color=Red, Manufacturer=Lumex, Operating Temperature=-25to85C, Package Description="2-Pin Surface Mount Device, Body 3.2 x 1.5 mm", Package Reference=SML-LX1206IC, Reverse Voltage=5(Min)V, Supplier_Package=SMD, Datasheet URL=http://www.lumex.com/content/files/ProductAttachment/SML-LX1206IC-TR.pdf, Datasheet Version="Rev. J, 08/2012", Dimension=3.2x1.6x1.1mm, Dominant Wavelength=N/A, ECCN=EAR99, Family=SML-LX1206IC, HTS=8541402000, Intensity=6mcd, LED Material=GaAsP, Lens Appearance=ColorlessNonDiffused, Lens Dimensions=2x1.6x0.5mm, Manufacturer URL=http://www.lumexinstruments.com/, Mounting=SurfaceMount, Mounting Technology=SurfaceMount, Number of LEDs=1, Packaging=TapeandReel, Part No=SML-LX1206IC-TR, Peak Wavelength=635nm, Pin_Count=2, RoHS=Unknown, Supplier=Lumex, Supplier Standard Pack=3,000, Type=Uni-Color, Viewing Angle=160
FB1 FB2: library part CMP-08257-000007-1, "FERRITE BEAD 100 OHM 0805 1LN", Case Code (Imperial)=0805, Case Code (Metric)=2012, DC Resistance (DCR)=20mR, Max Current Rating=4A, Max Operating Temperature=125°C, Min Operating Temperature=-55°C, Package Quantity=4000, Ratings=AEC-Q200, Test Frequency=100MHz, Tolerance=25%, Case/Package=0805, Core Material=Ferrite, Depth=1.25mm, Height=0.85mm, Impedance=100R, Lead Free="Lead Free", Length=0.079inch, Max DC Current=4A, Mount="Surface Mount", Number of Lines=1, Packaging="Tape and Reel", Termination=SMD/SMT, Weight=0.000194oz, Width=1.25mm
J1: library part CMP-2000-05888-3, "CONN HEADER VERT 2POS 2.5MM", Color=Natural, Contact Resistance=20mR, Current Rating=3A, Housing Color=White, Insulation Resistance=1GR, Max Operating Temperature=85°C, Max Voltage Rating (AC)=250V, Min Operating Temperature=-25°C, Connector Type="Male Pin", Contact Material=Brass, Contact Plating=Tin, Contact Type="Male Pin", Depth=5.75mm, Fastening Type=Detent, Housing Material=Polyamide, Lead Free="Lead Free", Lead Pitch=2.5mm, Length=7.4mm, Max Current Rating=3A, Max Voltage Rating (DC)=250V, Mount="Through Hole", Number of Contacts=2, Number of Positions=2, Number of Rows=1, Orientation=Straight, Packaging=Bulk, Pitch=2.5mm, REACH SVHC="No SVHC", Series=XH, Termination=Solder, Voltage Rating=250V, Voltage Rating (AC)=250V, Wire/Cable Gauge=22AWG
J2: library part CMP-2000-05888-3, "To power Switch", Color=Natural, Contact Resistance=20mR, Current Rating=3A, Housing Color=White, Insulation Resistance=1GR, Max Operating Temperature=85°C, Max Voltage Rating (AC)=250V, Min Operating Temperature=-25°C, Connector Type="Male Pin", Contact Material=Brass, Contact Plating=Tin, Contact Type="Male Pin", Depth=5.75mm, Fastening Type=Detent, Housing Material=Polyamide, Lead Free="Lead Free", Lead Pitch=2.5mm, Length=7.4mm, Max Current Rating=3A, Max Voltage Rating (DC)=250V, Mount="Through Hole", Number of Contacts=2, Number of Positions=2, Number of Rows=1, Orientation=Straight, Packaging=Bulk, Pitch=2.5mm, REACH SVHC="No SVHC", Series=XH, Termination=Solder, Voltage Rating=250V, Voltage Rating (AC)=250V, Wire/Cable Gauge=22AWG
L1: library part CMP-07248-000065-1, "FIXED IND 100UH 2.5A 135MOHM SMD", Case/Package=1210, Current Rating=2.5A, DC Resistance (DCR)=135mR, Inductance=100uH, Inductance Tolerance=20%, Max Operating Temperature=125°C, Min Operating Temperature=-40°C, Package Quantity=1, Resistor Type=Wirewound, Saturation Current=2.2A, Self Resonant Frequency=3MHz, Test Frequency=100kHz, Core Material=Ferrite, DC Current=2.5A, Depth=12.5mm, Height=10mm, Height - Seated (Max)=0.394inch, Length=12mm, Max DC Current=2.5A, Military Standard=Not, Mount="Surface Mount", Packaging="Tape and Reel", Q Factor=16, REACH SVHC="No SVHC", RMS Current (Irms)=2.5A, RoHS Compliant=Yes, Series=SRR1210, Shielding=Shielded, Termination=SMD/SMT, Tolerance=20%, Width=0.472inch
L2 L3: library part CMP-06042-016670-1, "Multilayer Type Inductor for General Circuits, 0805 (2012), 0.56μH, 10%, 0.63Ω, 150mA", Case Code (Imperial)=0805, Case Code (Metric)=2012, Current Rating=150mA, DC Resistance (DCR)=630mR, Max Operating Temperature=85°C, Min Operating Temperature=-40°C, Package Quantity=4000, Self Resonant Frequency=140MHz, Test Frequency=25MHz, Tolerance=10%, Case/Package=0805, Core Material=Ferrite, DC Current=150mA, Depth=1.45mm, Height=0.85mm, Height - Seated (Max)=0.041inch, Inductance=560nH, Lead Free="Lead Free", Length=2mm, Max DC Current=150mA, Military Standard=Not, Mount="Surface Mount", Packaging="Tape and Reel", Q Factor=25, Radiation Hardening=No, RoHS Compliant=Yes, Series=LQM21N, Shielding=Shielded, Termination=SMD/SMT, Width=1.25mm
LS1: library part CMP-08413-000003-1, "AUDIO PIEZO TRANSDUCER 30V TH", Frequency=4kHz, Max Operating Temperature=70°C, Min Operating Temperature=-10°C, Operating Supply Voltage=3V, Package Quantity=350, Diameter=14mm, Height=8mm, Lead Free="Lead Free", Mount="Through Hole", Number of Terminals/Pins=2, Packaging="Tape and Reel", RoHS Compliant=Yes, Self Resonant Frequency=4kHz, Termination="PC Pins", Voltage Rating (DC)=3V, Washable=No
MD1: library part CMP-194065-000008-1, "RX TXRX MOD WIFI SURFACE MOUNT", Case/Package=SMD/SMT, Frequency=2.5GHz, Max Operating Temperature=85°C, Min Operating Temperature=-40°C, Operating Supply Voltage=3.6V, Package Quantity=550, Data Rate=150Mbps, Mount="Surface Mount", Packaging="Cut Tape", Sensitivity=-98dBm, Weight=0.088185oz
P1: library part CMP-1502-00585-2, Color=Beige, Contact Resistance=20mΩ, Current Rating=3A, Flammability Rating="UL94 V-0", Insulation Resistance=1GΩ, Max Operating Temperature=105°C, Min Operating Temperature=-40°C, Operating Supply Voltage=250V, Connector Type="Male Pin", Contact Gender=Male, Contact Material=Copper, Contact Mating Length=7.493mm, Contact Plating=Tin, Fastening Type=Friction, Gender=Male, Height=12.5mm, Housing Material=Nylon, Lead Pitch=2.54mm, Length=7.62mm, Mount="Through Hole", NexarPartId=18818222, Number of Contacts=3, Number of Pins=3, Number of Positions=3, Number of Rows=1, Orientation=Vertical, Packaging=Bulk, Pitch=2.54mm, REACH SVHC=Unknown, RoHS=Compliant, Termination="Through Hole", Voltage Rating=250V, Width=7.66mm
Q1: library part CMP-1177-00042-1, "NPN Silicon AF Transistor, 45 V VCEO, 100 mA IC, SOT23, Reel, Green", Manufacturer=Infineon, PartNumber=BC847B, ComponentLink1Description="Manufacturer URL", ComponentLink1URL=http://www.infineon.com/, ComponentLink2Description=Datasheet, ComponentLink2URL=http://www.infineon.com/dgdl/bc847series_bc848series_bc849series_bc850series.pdf?folderId=db3a304314dca389011541d30fa21656&fileId=db3a304314dca389011541d4630a1657, ComponentLink3Description="Package Specification", ComponentLink3URL=http://www.infineon.com/dgdl/SOT23-Package_Overview.pdf?folderId=db3a30431936bc4b0119532290053c66&fileId=db3a30431936bc4b0119533468123c85, fT (typ)="250Â MHz", Green=TRUE, IBM (max)="200Â mA", IC (max)="100Â mA", ICBO (max)="15Â nA", ICM (max)="200Â mA", Mounting Technology="Surface Mount", PackageDescription="3-Pin Small Outline Transistor Package, 1.3 x 2.9 mm Body, 0.95 mm Pitch", PackageReference=SOT23, PackageVersion=Apr-08, Packing=Reel, Polarity=NPN, Ptot (max)="330Â mW", VCBO (max)="50Â V", VCEO (max)="45Â V", VEBO (max)="6Â V"
R1: library part CR1206-FX-1022ELF, "Resistor", Manufacturer_Name=Bourns, Mouser Part Number=652-CR1206FX-1022ELF, Arrow Part Number=CR1206-FX-1022ELF, Arrow Price/Stock=https://www.arrow.com/en/products/cr1206-fx-1022elf/bourns, Datasheet Link=http://componentsearchengine.com/Datasheets/1/CR1206-FX-1022ELF.pdf, Height=0.75mm, Manufacturer_Part_Number=CR1206-FX-1022ELF, Mouser Price/Stock=https://www.mouser.co.uk/ProductDetail/Bourns/CR1206-FX-1022ELF?qs=3wWX5hyYeeRJQVfgTvfo2Q%3D%3D
R2: library part CMP-2100-03671-1, "Chip Resistor, 1 KOhm, +/- 1%, 125 mW, -55 to 155 degC, 0805 (2012 Metric), RoHS, Tape and Reel", Case Code (Imperial)=0805, Case Code (Metric)=2012, Manufacturer=Yageo, Max Operating Temperature=155degC, Max Power Dissipation=125mW, Min Operating Temperature=-55degC, Package Description="2-Pin Surface Mounted Device, Body 2 x 1.25 mm", Package Quantity=1, Resistance=1KOhm, Temperature Coefficient=100ppm/degreesC, Tolerance=1%, Voltage Rating=150V, Case/Package=0805, Composition=ThickFilm, Datasheet URL=http://www.yageo.com/NewPortal/yageodocoutput?fileName=/pdf/R-Chip/PYu-RC_Group_51_RoHS_L_5.pdf, Datasheet Version="Rev. 5, 10/2016", Depth=1.25mm, Height=0.024inch, Lead Free=LeadFree, Length=0.079inch, Manufacturer URL=http://www.yageo.com/, Military Standard=Not, Number of Pins=2, Number of Terminations=2, Package Reference=0805, Packaging=TapeandReel, Power Rating=125mW, REACH SVHC=Unknown, RoHSCompliant=true, Termination=SMD/SMT, Voltage Rating (DC)=150V, Width=0.049inch
R3 R11: library part CMP-2100-03670-1, "Chip Resistor, 10 Ohm, +/- 1%, 0.125 W, -55 to 155 degC, 0805 (2012 Metric), RoHS, Tape and Reel", Case Code (Imperial)=0805, Case Code (Metric)=2012, Manufacturer=Yageo, Max Operating Temperature=155degC, Max Power Dissipation=125mW, Min Operating Temperature=-55degC, Package Description="2-Pin Surface Mounted Device, Body 2 x 1.25 mm", Package Quantity=1, Resistance=10Ohm, Temperature Coefficient=200ppm/degreesC, Tolerance=1%, Voltage Rating=150V, Case/Package=0805, Composition=ThickFilm, Datasheet URL=http://www.yageo.com/NewPortal/yageodocoutput?fileName=/pdf/R-Chip/PYu-RC_Group_51_RoHS_L_5.pdf, Datasheet Version="Rev. 5, 10/2016", Depth=1.25mm, Height=0.5mm, Lead Free=LeadFree, Length=2mm, Manufacturer URL=http://www.yageo.com/, Number of Pins=2, Number of Terminations=2, Package Reference=0805, Packaging=TapeandReel, Power Rating=125mW, REACH SVHC=NoSVHC, RoHSCompliant=true, Termination=SMD/SMT, Voltage Rating (DC)=150V, Width=1.25mm
R4: library part CMP-1659-00013-4, "Chip Resistor, 10 KOhm, +/- 1%, 0.125 W, -55 to 155 degC, 0805 (2012 Metric), RoHS, Tape and Reel", Manufacturer=Yageo, Max Operating Temperature="155 degC", Min Operating Temperature="-55 degC", Package Quantity=5000, Voltage Rating="150 V", ComponentLink1Description="Manufacturer URL", ComponentLink1URL=http://www.yageo.com/, ComponentLink2Description=Datasheet, ComponentLink2URL=http://www.yageo.com/documents/recent/PYu-RC_Group_51_RoHS_L_04.pdf, DatasheetVersion="Rev. 4, 02/2016", Height="0.5 mm", Length="2 mm", Mount="Surface Mount", Mounting Technology="Surface Mount", PackageDescription="2-Pin Surface Mounted Device, Body 2 x 1.25 mm", PackageReference=0805, Packaging="Tape and Reel", Pins=2, REACH SVHC="No SVHC", RoHSCompliant=true
R5: library part CMP-1013-00510-2, Manufacturer="Vishay Dale", Part Number=CRCW08051K00FKEA
R6: library part CMP-2001-03615-2, "RES Thick Film, 1.5kΩ, 1%, 0.125W, 100ppm/°C, 0805", Case Code (Imperial)=0805, Case Code (Metric)=2012, Max Operating Temperature=155°C, Max Power Dissipation=125mW, Min Operating Temperature=-55°C, Package Quantity=10, Resistance=1.5kR, Temperature Coefficient=100ppm/°C, Tolerance=1%, Voltage Rating=150V, Case/Package=0805, Composition="Thick Film", Contact Plating=Tin, Depth=1.25mm, Features="Automotive AEC-Q200", Height=0.45mm, Lead Free="Lead Free", Length=2mm, Military Standard=Not, Number of Terminations=2, Packaging="Tape and Reel", Power Rating=125mW, Radiation Hardening=No, Termination=SMD/SMT, Voltage Rating (DC)=150V, Weight=0.000194oz, Width=0.049inch
R7 R10: library part CMP-2001-00490-1, Manufacturer=Panasonic, Part Number=ERJ6BQF1R5V
R8 R9: library part CMP-2002-08382-1, Manufacturer="Vishay Dale", Part Number=CRCW040222R0FKED
R12: library part CMP-2001-00044-1, Manufacturer=Panasonic, Part Number=ERJ6ENF2200V
SW1 SW2: library part CMP-2000-07511-1, "FSMSM Push Button Switch, 50 mA, -35 to 85 degC, 2-Pin SMD, RoHS, Bulk", Case\/Package=SMD/SMT, Contact Current Rating=50mA, Contact Resistance=100mOhm, Manufacturer="TE Connectivity", Max Operating Temperature=85degC, Max Voltage Rating (DC)=12V, Min Operating Temperature=-35degC, Operating Force=180gf, Package Description="2-Pin Surface Mount Device, Body 6 x 3.5 mm, Pitch 9.19 mm", Package Quantity=1000, Package Reference=FSMSM, Voltage Rating (DC)=24V, Actuator Length=1.07mm, Actuator Material=Polyamide, Contact Material=Brass, Contact Plating=Silver, Current Rating=50mA, Datasheet URL=http://www.te.com/commerce/DocumentDelivery/DDEController?Action=showdoc&DocId=Customer+Drawing%7F1437566-3%7FC2%7Fpdf%7FEnglish%7FENG_CD_1437566-3_C2_1437566_3_1_c.dwg.pdf%7F1437566-3, Datasheet Version="Rev. C2, 08/2014", Electrical Life=20000Cycles, ELV=Compliant, Illumination Type=Illuminated, Lead Free=LeadFree, Manufacturer URL=http://www.te.com/, Mechanical Life=20000Cycles, Mount=SurfaceMount, Mounting Technology=SurfaceMount, Orientation=Straight, Packaging=LoosePiece, REACH SVHC=Unknown, RoHSCompliant=true, Switch Travel=0.25mm, Termination=GullWing, Throw Configuration=SPST
TP1 TP2 TP3 TP4: library part CMP-1672-00002-4, "Test Point, Red, Through Hole, RoHS, Bulk", Colour=Red, Manufacturer=Keystone, Package Quantity=100, ComponentLink1Description="Manufacturer URL", ComponentLink1URL=http://www.keyelco.com/, ComponentLink2Description=Datasheet, ComponentLink2URL=http://www.keyelco.com/product-pdf.cfm?p=1319, Contact Material=Bronze, Contact Plating=Silver, DatasheetVersion="Rev. F, 12/2013", Height="8.12 mm", Mount="Through Hole", Mounting Technology="Through Hole", PackageDescription="1-Pin Through Hole Device, Dia 3.17 mm", PackageReference=5010, Packaging=Bulk, Pins=1, REACH SVHC="No SVHC", RoHSCompliant=true
TP5 TP6 TP7 TP8 TP9 TP10 TP11: library part CMP-1672-00009-1, "Test Point, Orange, 1-Pin THD, RoHS", Forward Current="3 A", Forward Voltage="1.08 V", Max Operating Temperature="150 degC", Max Surge Current="80 A", Min Operating Temperature="-65 degC", Package Quantity=500, Peak Reverse Current="600 uA", ComponentLink1Description="Manufacturer URL", ComponentLink1URL=http://www.keyelco.com/, ComponentLink2Description=Datasheet, ComponentLink2URL=http://keyelco.com/userAssets/file/M65p56.pdf, DatasheetVersion=Jun-15, Diameter="5.3 mm", Height="0.25 inch", Length="9.5 mm", Mount="Through Hole", PackageDescription="1-Pin Through Hole Device, Dia 2.54 mm", PackageReference=5003, Packaging=Bulk, Pins=2, Radiation Hardening=No, REACH SVHC="No SVHC", RoHSCompliant=true, Weight="0.01 lb", Width="0.25 inch"
U1: library part CMP-0069-00276-3, "SIMPLE SWITCHER® Power Converter 150 KHz 3A Step-Down Voltage Regulator, 5-pin TO-263", Manufacturer="Texas Instruments", PackageTopMarking="NSUZXYTTE#*LM2596S*-3.3 P+", PowerWise=N, Code_JEDEC=MO-169-AB, ComponentLink1Description="Datasheet URL", ComponentLink1URL=http://www.ti.com/general/docs/lit/getliterature.tsp?genericPartNumber=LM2596&fileType=pdf, CompType=Switcher, PackageDescription="TO-263, Molded, .400 x .390 x .180in, 5 Lead, .067in Pitch, Surface Mount", PackageReference=KTT0005B, PinCount=5, RoHS=N
U2: library part CMP-2000-05282-1, "NFC Controller, 13.56 MHz, -30 to 85 degC, 40-Pin HVQFN (SOT618-1), RoHS, Tray", Manufacturer="NXP Semiconductors", Maximum Operating Temperature=+85C, Minimum Operating Temperature=-25C, Operating Frequency=13.56MHz, Package / Case=QFN-40, Supply Current=12uA, Supply Voltage - Max=5.5V, Supply Voltage - Min=2.7V, Brand=NXPSemiconductors, Datasheet URL=https://datasheet.ciiva.com/1172/1391932-1172875.pdf, Datasheet Version="Rev. 1.2, 03/2011", Factory Pack Quantity=490, Manufacturer URL=http://www.nxp.com/, Mounting Style=SMD/SMT, Packaging=Tray, Product Category=RFWirelessMisc, RoHS=Details, Type=NearFieldTransmissionModule,Read/Write
U$36 U$37 U$38 U$39: library part MOUNTINGHOLE_3.0, PackageName=MOUNTINGHOLE_3.0
Y1: library part CMP-27762-000994-1, "Crystal 27.12MHz ±30ppm 18pF SMD-4 3.2mm x 2.5mm", Capacitance=1.8E-11F, Case/Package=SMD/SMT, ESR (Equivalent Series Resistance)=50R, Frequency=27.12MHz, Frequency Stability=50ppm, Frequency Tolerance=30ppm, Load Capacitance=18pF, Max Operating Temperature=70°C, Min Operating Temperature=-20°C, Height=0.031inch, Lead Free="Lead Free", Length=0.126inch, Mount="Surface Mount", Packaging="Tape and Reel", RoHS Compliant=Yes, Width=0.098inch

## Free pads (board coordinates)
  round 3 hole 3 unplated: MH1(5.461,5.588) MH1(5.461,45.212) MH1(180.975,44.704) MH1(181.229,5.969)

## Via types
v1: diameter 0.907/0.907 (per signal layer), hole 0.5, Top Layer to Bottom Layer, 148 vias
v2: diameter 0.5, hole 0.2, Top Layer to Bottom Layer, 16 vias

## Nets (pads, with @x,y where several pads share a name; then routed paths per layer and width w, separated by ;. In a path a pad name is that pad's centre, name@x,y a point inside that pad or via, vN(x,y) a via of type N, cw(c..) or ccw(c..) an arc to the next point about the centre after c; other vN are vias at no path point)
AVDD: C9.2 C10.2 FB1.2 U2.8 | length 12.7
  Top Layer w0.3: FB1.2 84.963,18.083 85.139,17.907 88.558,17.907 88.734,18.083 C9.2 C10.2 88.734,21.182 89.184,21.632 90.041,21.632 91.785,23.376 92.709,23.376 U2.8@92.715,23.37
EN: C6.1 MD1.3 R2.2 SW2.1 | length 38.5
  Top Layer w0.3: SW2.1 105.225,5.715 107.092,7.582 107.092,7.905 v1(107.188,8.001) ; v1(107.315,24.638) 107.322,24.638 107.957,25.273 108.235,25.273 111.506,28.544 C6.1
  Top Layer w0.6: R2.2@108.555,31.99 111.409,31.99 C6.1 111.858,32.44 112.32,32.44 113.312,33.431 113.312,34.43 114.483,35.601 115.356,35.601 MD1.3
  Bottom Layer w0.3: v1(107.188,8.001) 107.251,8.064 107.251,24.575 v1(107.315,24.638)
FB3: C2.2 C3.2 C4.2 C12.1 C13.2 D2.2 D4.1 L1.2 LS1.1 MD1.2 R1.2 R2.1 R4.2 TP4.1 U1.4 U2.17 U2.23 U2.40 | length 215.2
  Top Layer w0.3: D2.2 77.597,43.815 77.597,36.322 78.359,35.56 81.635,35.56 82.9,36.825 R4.2 92.413,37 92.71,36.703 v1(92.71,35.687) ; v1(92.71,32.766) 92.671,32.727 C12.1 92.671,29.618 93.54,28.749 U2.40@93.54,27.695 ; U2.17@96.54,21.545 96.54,18.395 97.028,17.907 v1(100.711,17.907) ; U2.23@98.865,23.37 98.866,23.369 v1(101.6,23.368) v1(101.6,23.368) 103.036,23.368 C13.2
  Top Layer w0.5: R1.2 TP4.1
  Top Layer w0.6: v1(101.473,30.734) 101.527,30.734 v1@101.582,30.679 ; R2.1@108.331,33.893 R2.1@108.394,33.957 ; C3.2@108.394,37.032 C3.2@108.418,37.009 ; C4.2@111.291,37.009 C4.2 111.429,36.971 115.456,36.971 MD1.2
  Top Layer w0.8: v1(100.711,17.907) 105.107,13.511 110.267,13.511 LS1.1 115.142,8.636 D4.1 124.723,6.105 v1(124.714,6.096) ; v1(101.473,30.734) 104.632,33.893 R2.1@108.331,33.893 ; v1(103.124,36.83) 103.39,37.096 C3.2 108.394,37.032 R2.1@108.394,33.957 ; C3.2@108.418,37.009 C4.2@111.291,37.009 ; v1(159.639,11.049) L1.2@159.639,19.334
  Top Layer w1: U1.4 156.259,24.158 159.736,20.681 L1.2 159.736,18.181 161.915,16.002 TP4.1 165.271,16.212 165.271,16.99 165.227,17.034 165.227,20 167.767,22.54 C2.2
  Bottom Layer w0.3: v1(92.71,32.766) 94.107,31.369 100.838,31.369 v1(101.473,30.734) v1@101.536,30.67 ; v1@101.536,23.431 v1(101.6,23.368)
  Bottom Layer w0.7: v1(100.711,17.907) 101.6,18.796 v1(101.6,23.368)
  Bottom Layer w0.8: v1(92.71,35.687) 101.981,35.687 v1(103.124,36.83) ; v1(124.714,6.096) 154.686,6.096 v1(159.639,11.049)
  Bottom Layer w0.9: v1@101.536,23.431 v1@101.536,30.67
GND: C1.1 C2.1 C3.1 C4.1 C5.2 C6.2 C7.1 C8.1 C9.1 C10.1 C11.2 C12.2 C13.1 C14.1 C15.1 C16.1 C17.1 C18.1 C22.1 C23.1 C24.1 C25.2 C28.2 C29.2 D1.1 DS1.2 J1.2 MD1.1 MD1.15 MD1.38 MD1.39 P1.3 Q1.2 R3.2 R8.2 R9.1 R11.2 SW1.2 SW2.2 TP2.1 TP7.1 TP8.1 U1.3 U1.5 U1.6 U2.1 U2.3 U2.7 U2.11 U2.16 U2.18 U2.41 Y1.2 Y1.4 | length 130.2
  Top Layer w0.3: C18.1 84.074,16.098 84.074,17.018 v1(84.328,17.272) ; C9.1 C10.1 87.034,21.182 87.987,22.135 89.027,22.135 89.535,22.643 89.535,23.622 89.789,23.876 91.573,23.876 91.576,23.879 U2.7@92.715,23.879 ; C12.2 90.932,29.679 90.932,27.94 91.44,27.432 ; U2.7@92.715,23.87 U2.41@95.04,23.87 ; U2.1@92.715,26.87 92.002,26.87 91.44,27.432 ; v1(92.837,20.193) 92.837,20.617 93.54,21.32 U2.11@93.54,21.545 ; v2(95.24,24.07) v1(95.79,24.62) ; U2.41@96.012,23.495 U2.41@96.012,24.398 ; U2.16@96.04,21.545 96.04,22.72 96.29,22.97 v2(96.34,22.97) ; U2.18@97.04,21.545 97.04,23.37 v2(96.34,24.07) U2.41@96.012,24.398 ; U2.41@97.29,22.97 v2(97.44,22.97) ; v1(127,36.449) v1(128.905,36.449) ; U1.5 158.85,31.469 158.877,31.496 ; 91.44,27.432 91.44,26.289 91.821,25.908 92.677,25.908 92.715,25.87 94.54,25.87 v2(95.24,25.17) v1(95.79,24.62) ; v1(95.79,24.62) U2.41@96.012,24.398
  Top Layer w0.356: 65.278,22.41 R8.2@65.278,23.299 ; R8.2@65.278,23.31 R9.1@65.278,29.175 ; R9.1@65.278,29.293 65.278,30.055
  Top Layer w0.45: TP8.1 69.254,25.3 70.585,25.3 v1(70.612,25.273) v1(71.882,25.273) 73.225,25.273 73.279,25.327 75.057,25.327 76.708,25.327 TP7.1
  Top Layer w0.6: MD1.1 115.656,38.141 116.529,38.141 118.757,35.912 118.757,35.04 121.171,32.626 123.045,34.5 128.353,34.5 v1(130.302,36.449) ; MD1.15 118.291,23.521 121.171,26.401 MD1.39@121.171,28.956 ; v1(128.905,36.449) v1(130.302,36.449) ; MD1.38 132.356,38.141 131.483,38.141 130.361,37.019 130.361,36.508 v1(130.302,36.449)
  Top Layer w0.9: C29.2 71.351,23.46 71.881,23.99 71.881,25.272 v1(71.882,25.273) 71.881,25.274 71.881,26.429 71.351,26.959 C23.1 ; C28.2 73.279,25.327 C22.1
  Top Layer w1: MD1.39@121.171,28.956 121.171,30.791 123.006,30.791 MD1.39@124.841,30.791 ; MD1.39@121.171,32.626 123.006,32.626 124.841,32.626 MD1.39@124.841,30.791 ; MD1.39@123.006,28.956 124.841,28.956 MD1.39@124.841,30.791 ; U1.3 U1.6 ; TP2.1 167.703,40.957 167.703,32.353 C2.1
  Bottom Layer w0.356: v1(65.278,24.13) 65.278,24.765
  other v1: 105.518,2.892 147.574,3.429 122.047,3.556 114.808,5.207 70.612,6.858 172.085,8.382 105.471,9.223 97.155,9.525 103.886,9.525 78.74,10.414 70.612,11.176 105.41,11.684 72.517,11.811 102.235,12.065 124.206,14.097 72.39,14.224 100.076,14.224 105.41,15.367 76.2,16.51 71.501,16.891 105.567,17.058 102.997,17.653 136.525,17.653 75.057,17.907 77.851,17.907 73.279,18.161 145.542,18.161 105.41,18.923 100.33,19.05 105.517,21.147 100.584,21.336 90.297,23.114 105.41,23.114 95.758,23.495 94.615,24.638 96.901,24.638 75.057,25.146 76.708,25.146 73.279,25.273 181.737,25.527 95.758,25.781 105.283,28.448 100.076,29.718 103.378,29.718 105.32,30.023 105.156,31.623 74.93,32.258 73.279,32.512 71.501,32.635 76.962,32.762 99.06,32.766 85.852,33.139 80.264,33.782 71.501,34.163 81.788,34.29 72.771,35.687 75.311,35.687 105.029,35.786 85.102,35.806 146.05,36.322 117.475,36.449 118.999,36.449 120.396,36.449 121.92,36.449 123.444,36.449 125.095,36.449 71.12,37.338 75.946,37.973 101.473,38.481 104.906,38.604 136.398,39.116 173.609,39.624 136.271,40.132 82.55,40.386 85.598,40.386 87.884,40.386 112.014,40.513 104.902,41.021 136.271,41.402 112.014,41.656 161.798,41.656 70.358,41.91 95.758,41.91 98.552,42.164 88.138,42.672 102.489,42.672 136.271,42.799 148.59,42.799 90.678,42.926 112.014,42.926 104.998,44.066 136.271,44.323 113.03,44.577 86.106,45.593 136.271,45.847 113.03,46.101 104.861,46.406 98.933,46.609 82.804,46.863 78.867,47.371 70.358,47.498 113.03,47.625 104.902,47.879
  other v2: 94.14,22.97 95.24,22.97 94.14,24.07 97.44,24.07 94.14,25.17 96.34,25.17 97.44,25.17 94.14,26.27 95.24,26.27 96.34,26.27 97.44,26.27
NetC5_1: C5.1 MD1.25 SW1.1 | length 22.1
  Top Layer w0.6: MD1.25 132.506,15.601 131.354,14.449 C5.1 133.835,14.224 141.836,6.223 SW1.1
NetC14_2: C14.2 U2.37 | length 10.5